# EAGLE board PCB (EAGLE 9.7.0)
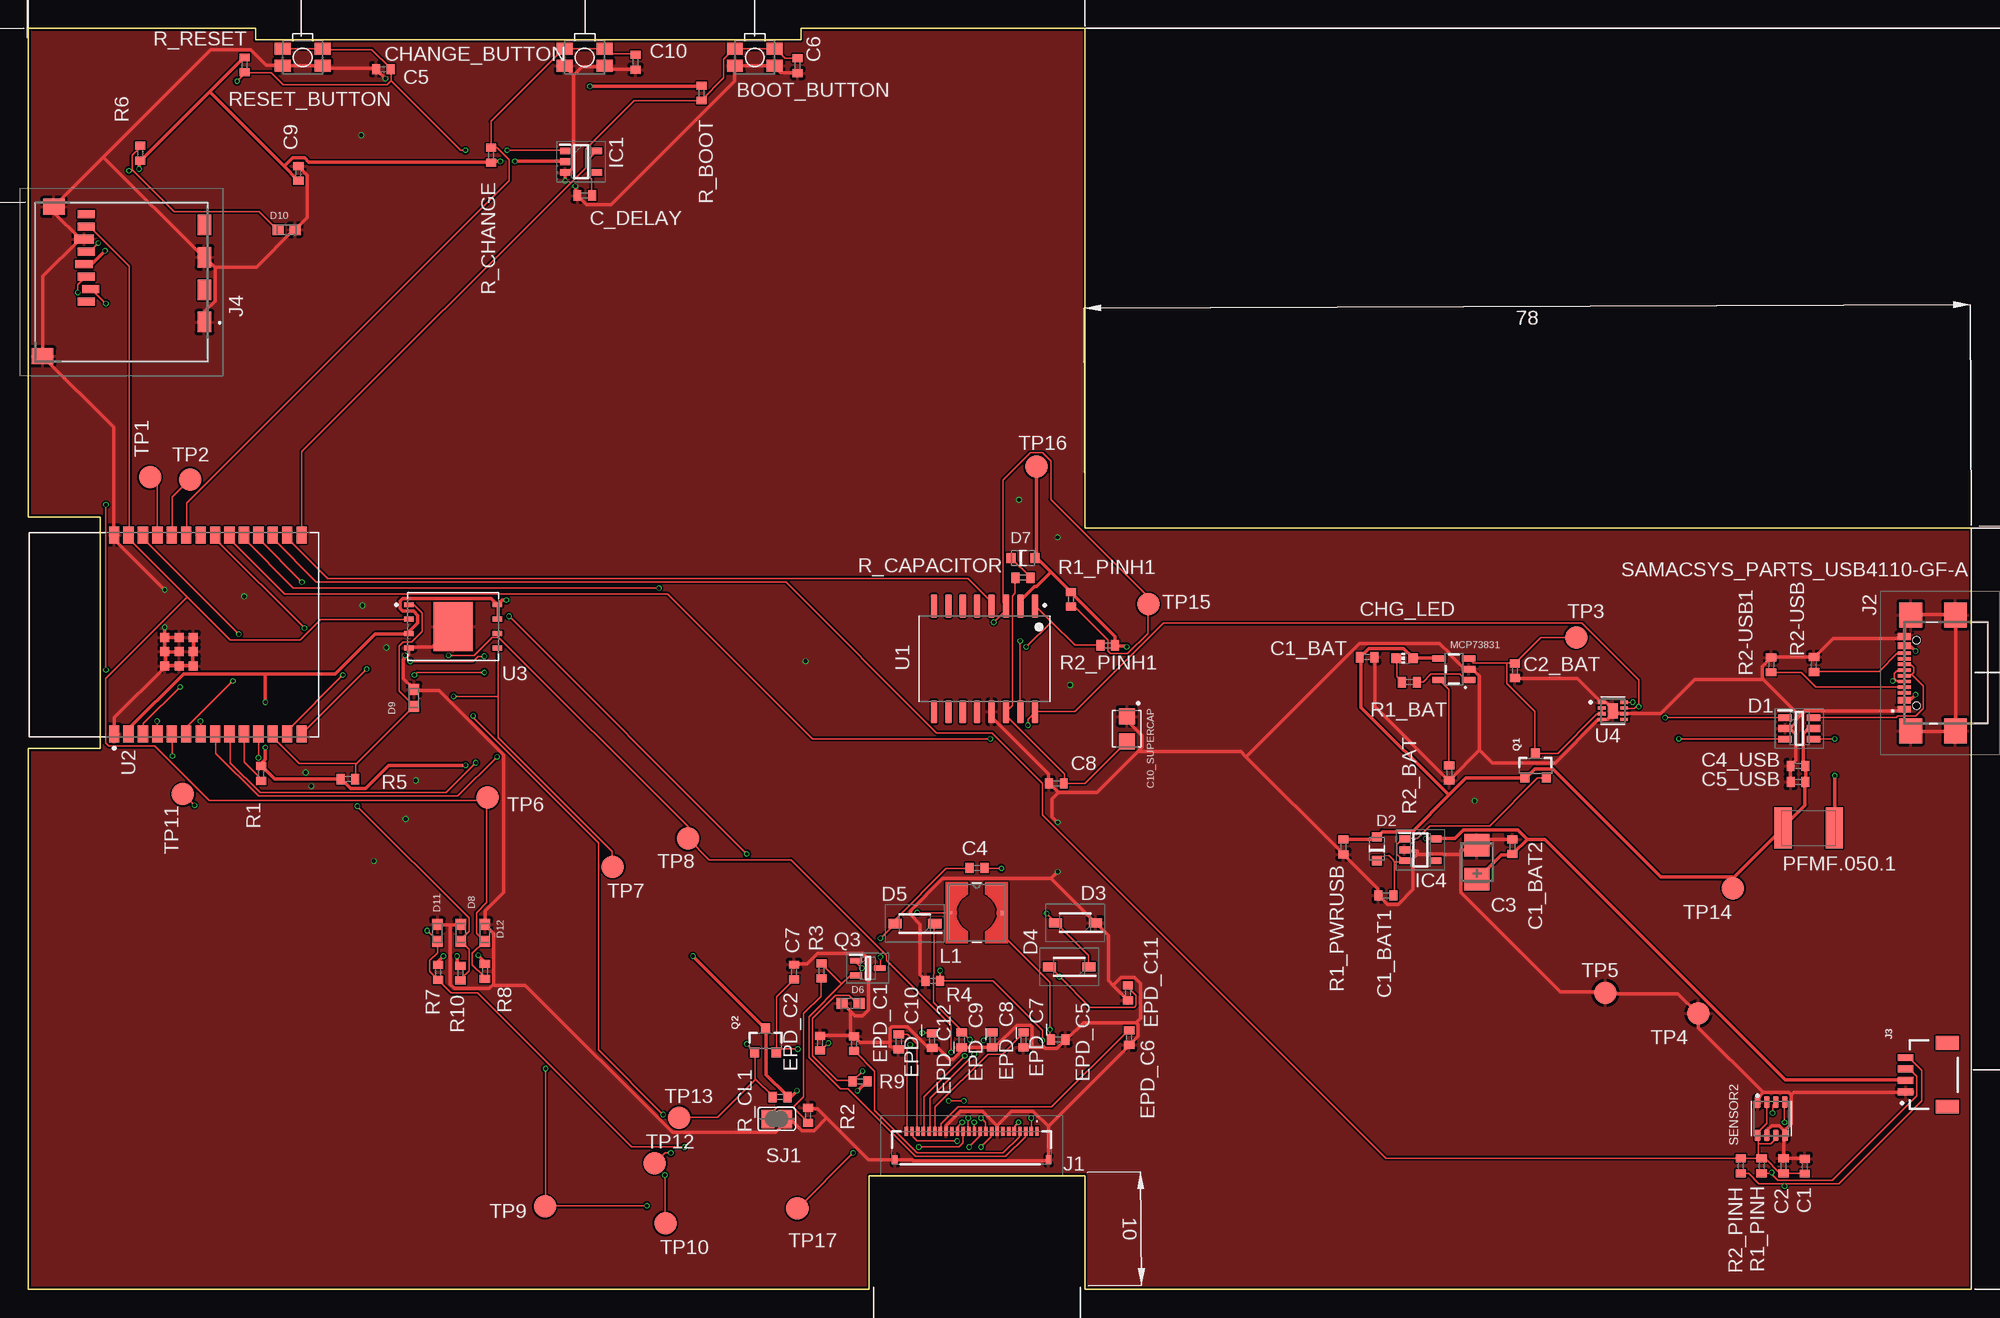
[diagram p0: board, top side]
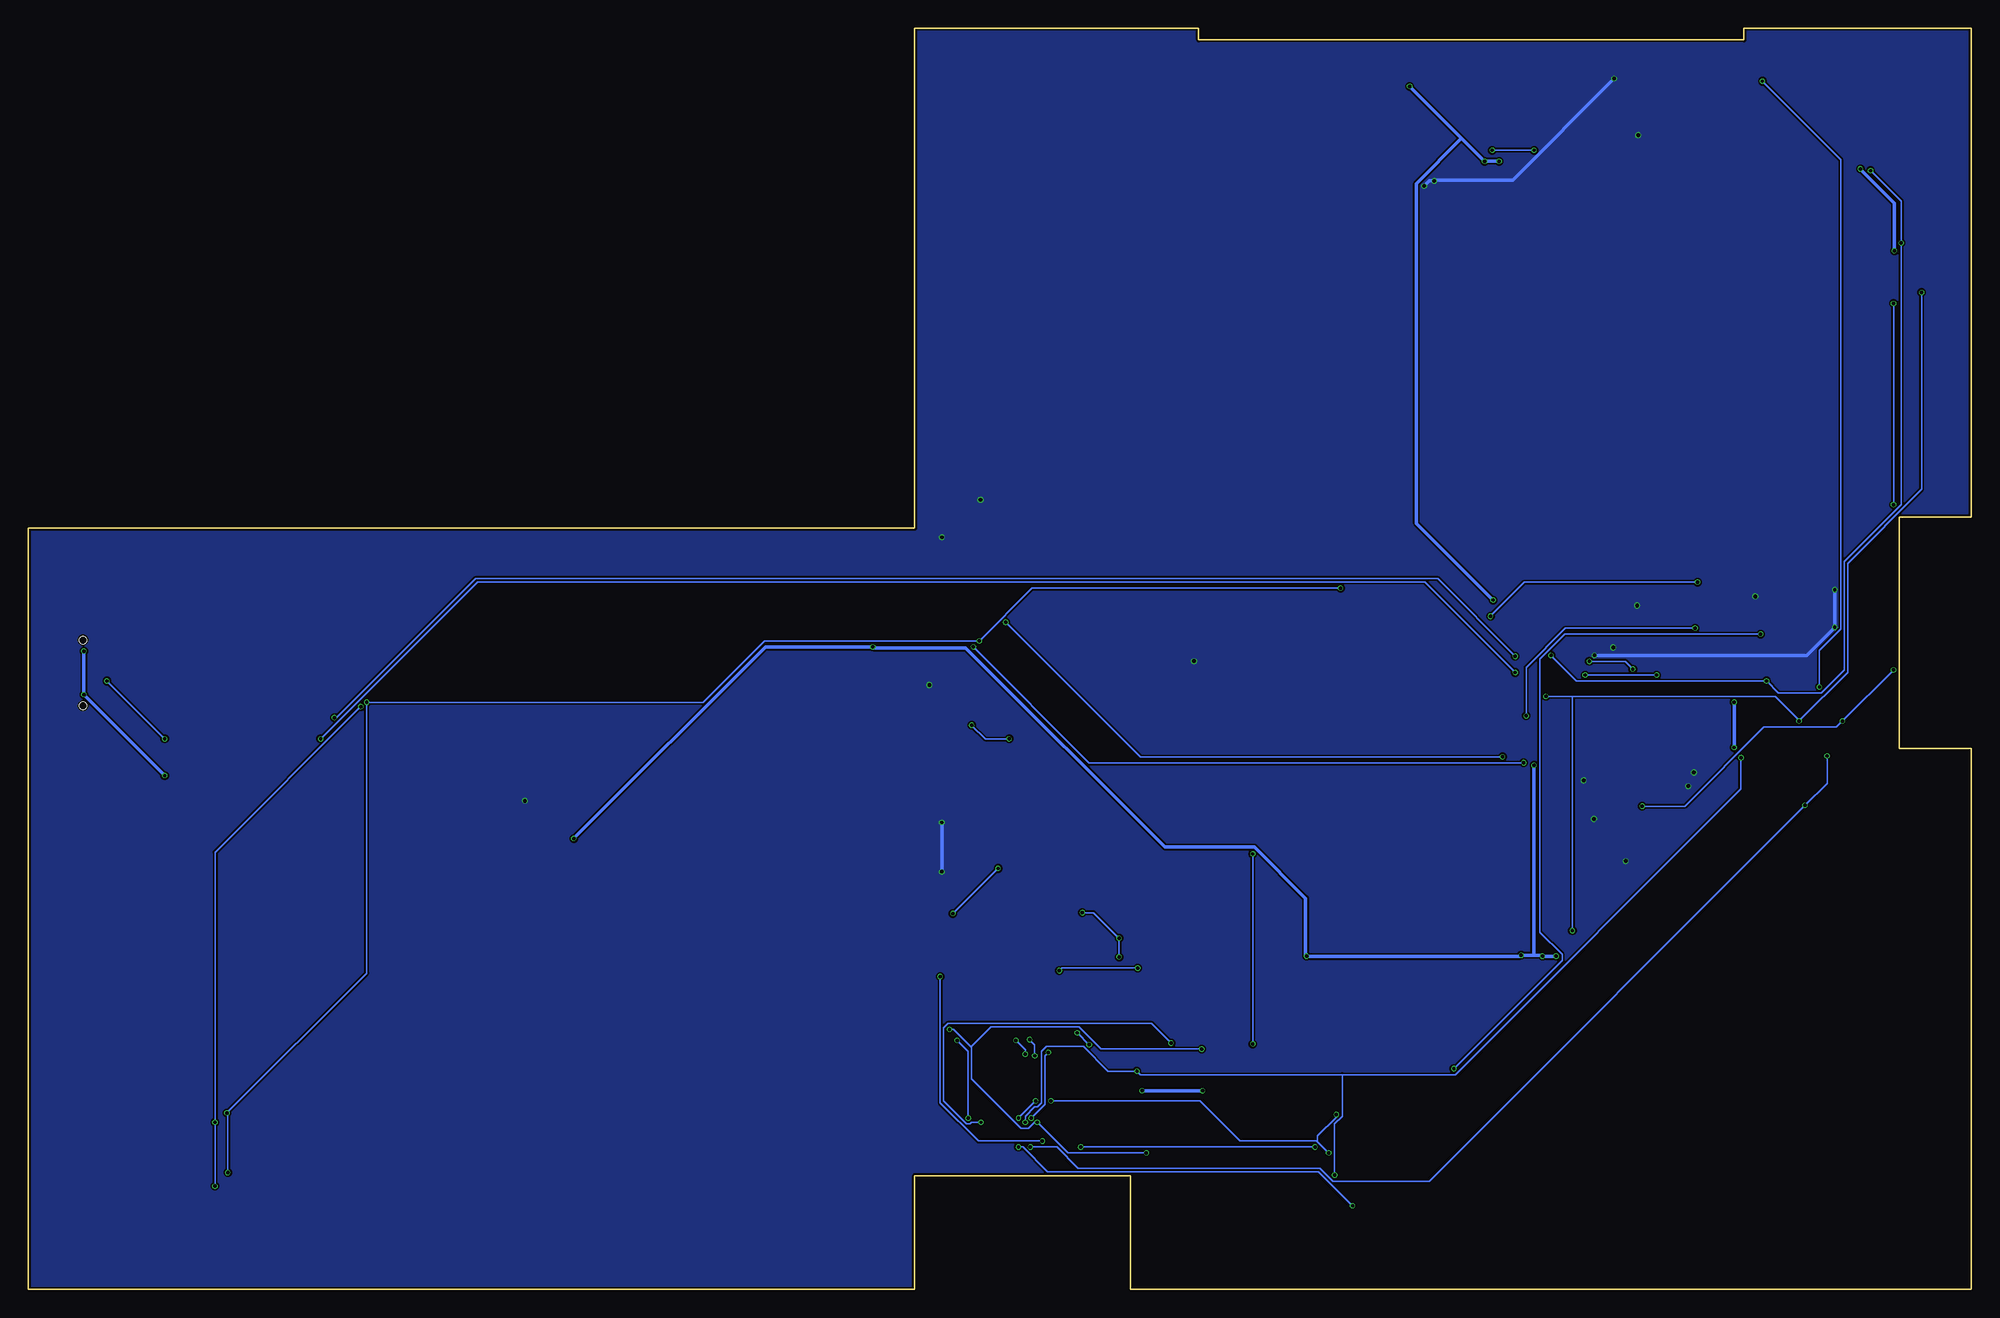
[diagram p1: board, bottom side, seen from below]

Size 171 x 111 mm. Coordinates in mm from the lower left corner, seen from the top.
Outline: 0,111 20,111 20,110 68,110 68,111 93,111 93,67 171,67 171,0 93,0 93,10 74,10 74,0 0,0 0,47.6 6.3,47.6 6.3,68 0,68 0,111
Copper layers (1*16): Top 0.035mm / dielectric 1.6mm / Bottom 0.035mm
Design rules "jlcpcb-2layers": minimum track width 0.15mm, minimum drill 0.3mm, track to track 0.15mm, track to pad 0.15mm, pad to pad 0.15mm, via to via 0.15mm, smd to smd 0.15mm, copper to edge 0.15mm, drill to drill 6mil, minimum pad ring 10mil, minimum via ring 3mil, stop-mask expansion 4mil, vias tented up to drill 0mil, thermal gap 10mil
Net classes: 1 power: width 0.3 mm

## Footprints (pad centres in the part's own frame; a part is rotated, then mirrored left to right if it is on the bottom)
MYBUTTON = smd 1.4 x 1.05: 1 1.75,0.75; 2 -1.75,0.75; 3 -1.75,-0.75; 4 1.75,-0.75
ESP32_WROVER_EAGLE-LTSPICE_C0402 = smd 0.7 x 0.9: 1 -0.65,0; 2 0.65,0
RCL_CT3528 = smd 2 x 2.2: + -1.5,0; - 1.5,0
CAPCP3225X100N = smd 1.4 x 1.4: 1 -1.1,0; 2 1.1,0
ADAFRUIT_CHIP-LED0603 = smd 0.8 x 0.8: A 0,-0.75; C 0,0.75
SOT95P280X145-6N = smd 1.2 x 0.6: 1 -1.25,0.95; 2 -1.25,0; 3 -1.25,-0.95; 4 1.25,-0.95; 5 1.25,0; 6 1.25,0.95
ESP32_WROVER_AVX---SD0805S020S1R0_AVX_SD0805S020S1R0_0 = smd 0.8 x 0.9: 1 -1.05,0; 2 1.05,0
SOD3716X135N = smd 1.15 x 0.8: 1 -1.75,0; 2 1.75,0
DIOC1608X36N = smd 0.97 x 0.94: 1 -0.75,0; 2 0.75,0
SOT95P280X125-5N = smd 0.9 x 0.6: 1 -1.4,0.95; 2 -1.4,0; 3 -1.4,-0.95; 4 1.4,-0.95; 5 1.4,0.95
SOT95P280X120-5N = smd 0.9 x 0.6: 1 -1.4,0.95; 2 -1.4,0; 3 -1.4,-0.95; 4 1.4,-0.95; 5 1.4,0.95
FH34SRJ24S05SH99 = smd 0.3 x 0.8: 1 5.75,1.45; 2 5.25,1.45; 3 4.75,1.45; 4 4.25,1.45; 5 3.75,1.45; 6 3.25,1.45; 7 2.75,1.45; 8 2.25,1.45; 9 1.75,1.45; 10 1.25,1.45; 11 0.75,1.45; 12 0.25,1.45; 13 -0.25,1.45; 14 -0.75,1.45; 15 -1.25,1.45; 16 -1.75,1.45; 17 -2.25,1.45; 18 -2.75,1.45; 19 -3.25,1.45; 20 -3.75,1.45; 21 -4.25,1.45; 22 -4.75,1.45; 23 -5.25,1.45; 24 -5.75,1.45 | smd 0.4 x 0.8: MP1 6.75,-1.05; MP2 -6.75,-1.05
SAMACSYS_PARTS_USB4110GFA = smd 0.3 x 1.15: A1 -3.35,3.678; A4 -2.55,3.678; A5 -1.25,3.678; A6 -0.25,3.678; A7 0.25,3.678; A8 1.25,3.678; A9 2.55,3.678; A12 3.35,3.678; B1 3.05,3.678; B4 2.25,3.678; B5 1.75,3.678; B6 0.75,3.678; B7 -0.75,3.678; B8 -1.75,3.678; B9 -2.25,3.678; B12 -3.05,3.678 | smd 2.18 x 2: MP1 -5.11,-0.827; MP2 5.11,-0.827; MP3 -5.11,3.103; MP4 5.11,3.103 | hole 0.65: -2.89,2.603; 2.89,2.603
JST04_1MM_RA = smd 0.6 x 1.35: 1 -1.5,0; 2 -0.5,0; 3 0.5,0; 4 1.5,0 | smd 1.2 x 2: NC1 2.8,-3.675; NC2 -2.8,-3.675
112ATAARR03ATTEND = smd 1.8 x 1.2: G1 10.6,10.4; G2 4.9,10.4; S1 7.75,10.4; S2 2.05,10.4 | smd 1.4 x 1.9: G3 13.6,-3.85; G4 0.45,-2.85 | smd 0.7 x 1.5: P1 8.8,0; P2 7.7,0.4; P3 6.6,0; P4 5.5,-0.2; P5 4.4,0; P7 2.2,0; P8 1.1,0 | smd 0.813 x 1.676: P6 3.3,-0.2
IND_4828-WE-TPC_WRE = smd 0.2 x 0.2: 1 -2.286,0 | smd 0.35 x 0.35: 2 2.286,0
ESP32_WROVER_SPARKFUN-IC-POWER_SOT23-5 = smd 0.55 x 1.2: 1 -0.95,-1.3; 2 0,-1.3; 3 0.95,-1.3; 4 0.95,1.3; 5 -0.95,1.3
ESP32C6_VARISTOR_CT/CN1812 = smd 1.5 x 3.6: 1 -2.25,0; 2 2.25,0
ESP32_WROVER_SPARKFUN-DISCRETESEMI_SOT23-3 = smd 0.8 x 0.9: 1 -0.95,-1; 2 0.95,-1; 3 0,1.1
SOT65P210X110-3N = smd 1.05 x 0.5: 1 -1.05,0.65; 2 -1.05,-0.65; 3 1.05,0
ESP32_WROVER_EAGLE-LTSPICE_R0402 = smd 0.7 x 0.9: 1 -0.65,0; 2 0.65,0
ESP32_WROVER_BME680_PSON80P300X300X100-8N = smd 1.016 x 0.5: 1 1.458,1.2; 2 1.458,0.4; 3 1.458,-0.4; 4 1.458,-1.2; 5 -1.458,-1.22; 6 -1.458,-0.4; 7 -1.458,0.4; 8 -1.458,1.2
SJ = smd 1.168 x 1.6: 1 -0.762,0; 2 0.762,0
TP20R = smd 2 x 2: TP 0,0
SOIC127P1032X265-16N = smd 2.05 x 0.59: 1 -4.655,4.445; 2 -4.655,3.175; 3 -4.655,1.905; 4 -4.655,0.635; 5 -4.655,-0.635; 6 -4.655,-1.905; 7 -4.655,-3.175; 8 -4.655,-4.445; 9 4.655,-4.445; 10 4.655,-3.175; 11 4.655,-1.905; 12 4.655,-0.635; 13 4.655,0.635; 14 4.655,1.905; 15 4.655,3.175; 16 4.655,4.445
XCVR_ESP32-C6-WROOM-1-N8 = smd 1.5 x 0.9: 1 -8.75,5.26; 2 -8.75,3.99; 3 -8.75,2.72; 4 -8.75,1.45; 5 -8.75,0.18; 6 -8.75,-1.09; 7 -8.75,-2.36; 8 -8.75,-3.63; 9 -8.75,-4.9; 10 -8.75,-6.17; 11 -8.75,-7.44; 12 -8.75,-8.71; 13 -8.75,-9.98; 14 -8.75,-11.25; 15 8.75,-11.25; 16 8.75,-9.98; 17 8.75,-8.71; 18 8.75,-7.44; 19 8.75,-6.17; 20 8.75,-4.9; 21 8.75,-3.63; 22 8.75,-2.36; 23 8.75,-1.09; 24 8.75,0.18; 25 8.75,1.45; 26 8.75,2.72; 27 8.75,3.99; 28 8.75,5.26 | smd 0.8 x 0.8: 29_1 -2.755,0.79; 29_2 -1.505,0.79; 29_3 -0.255,0.79; 29_4 -2.755,-0.46; 29_5 -1.505,-0.46; 29_6 -0.255,-0.46; 29_7 -2.755,-1.71; 29_8 -1.505,-1.71; 29_9 -0.255,-1.71
SON127P600X800X80-9N = smd 0.94 x 0.44: 1 -3.895,1.905; 2 -3.895,0.635; 3 -3.895,-0.635; 4 -3.895,-1.905; 5 3.895,-1.905; 6 3.895,-0.635; 7 3.895,0.635; 8 3.895,1.905 | smd 3.4 x 4.3: 9 0,0
SON50P200X200X80-9N = smd 0.76 x 0.27: 1 -0.985,0.75; 2 -0.985,0.25; 3 -0.985,-0.25; 4 -0.985,-0.75; 5 0.985,-0.75; 6 0.985,-0.25; 7 0.985,0.25; 8 0.985,0.75 | smd 0.9 x 1.3: 9 0,0

## Placement (x,y rotation side)
BOOT_BUTTON  BUTTON_CUSYOMV1BUTON  [MYBUTTON]  63.93,108.45 180 top
C1  100nF  [ESP32_WROVER_EAGLE-LTSPICE_C0402]  156.37,10.84 90 top
C1_BAT  4.7uF  [ESP32_WROVER_EAGLE-LTSPICE_C0402]  117.83,55.65 0 top
C1_BAT1  4.7uF  [ESP32_WROVER_EAGLE-LTSPICE_C0402]  119.48,34.67 180 top
C1_BAT2  4.7uF  [ESP32_WROVER_EAGLE-LTSPICE_C0402]  130.62,38.97 90 top
C2  100nF  [ESP32_WROVER_EAGLE-LTSPICE_C0402]  154.48,10.86 90 top
C2_BAT  4.7uF  [ESP32_WROVER_EAGLE-LTSPICE_C0402]  130.84,54.45 270 top
C3  100uF TANT  [RCL_CT3528]  127.51,37.6 90 top
C4  4.7uF/25V  [ESP32_WROVER_EAGLE-LTSPICE_C0402]  83.5,37.09 180 top
C4_USB  100nF  [ESP32_WROVER_EAGLE-LTSPICE_C0402]  155.76,46.07 180 top
C5  1uF  [ESP32_WROVER_EAGLE-LTSPICE_C0402]  31.25,107.41 180 top
C5_USB  4.7uF  [ESP32_WROVER_EAGLE-LTSPICE_C0402]  155.77,44.67 180 top
C6  100nF  [ESP32_WROVER_EAGLE-LTSPICE_C0402]  67.71,107.71 270 top
C7  10uF  [ESP32_WROVER_EAGLE-LTSPICE_C0402]  67.39,27.93 270 top
C8  100nF  [ESP32_WROVER_EAGLE-LTSPICE_C0402]  90.48,44.53 0 top
C9  100nF  [ESP32_WROVER_EAGLE-LTSPICE_C0402]  23.76,98.23 90 top
C10  100nF  [ESP32_WROVER_EAGLE-LTSPICE_C0402]  53.44,108.03 270 top
C10_SUPERCAP  CPH3225A  [CAPCP3225X100N]  96.69,49.34 270 top
C_DELAY  100nF  [ESP32_WROVER_EAGLE-LTSPICE_C0402]  48.97,96.29 180 top
CHANGE_BUTTON  BUTTON_CUSYOMV1BUTON  [MYBUTTON]  48.96,108.45 180 top
CHG_LED  [ADAFRUIT_CHIP-LED0603]  121.14,55.55 90 top
D1  USBLC6-2SC6Y  [SOT95P280X145-6N]  155.88,49.37 0 top
D2  ESP32_WROVER_AVX---SD0805S020S1R0_AVX_SD0805S020S1R0_0_0B1G_DIODE  [ESP32_WROVER_AVX---SD0805S020S1R0_AVX_SD0805S020S1R0_0]  118.69,38.78 90 top
D3  MBR0530MBR_SOD_DIODE  [SOD3716X135N]  92.16,32.27 180 top
D4  MBR0530MBR_SOD_DIODE  [SOD3716X135N]  91.62,28.38 180 top
D5  MBR0530MBR_SOD_DIODE  [SOD3716X135N]  78.03,32.19 180 top
D6  PGB1010603MRPGB_D1ODE  [DIOC1608X36N]  72.38,25.17 180 top
D7  ESP32_WROVER_AVX---SD0805S020S1R0_AVX_SD0805S020S1R0_0_0B1G_DIODE  [ESP32_WROVER_AVX---SD0805S020S1R0_AVX_SD0805S020S1R0_0]  87.54,64.38 0 top
D8  PGB1010603MRPGB_D1ODE  [DIOC1608X36N]  38.06,31.37 90 top
D9  PGB1010603MRPGB_D1ODE  [DIOC1608X36N]  33.94,52.07 90 top
D10  PGB1010603MRPGB_D1ODE  [DIOC1608X36N]  22.72,93.27 0 top
D11  PGB1010603MRPGB_D1ODE  [DIOC1608X36N]  36,31.37 90 top
D12  PGB1010603MRPGB_D1ODE  [DIOC1608X36N]  40.18,31.37 90 top
EPD_C1  1uF/50V  [ESP32_WROVER_EAGLE-LTSPICE_C0402]  72.68,21.62 270 top
EPD_C2  1uF/50V  [ESP32_WROVER_EAGLE-LTSPICE_C0402]  69.68,21.67 270 top
EPD_C5  0.1uF/50V  [ESP32_WROVER_EAGLE-LTSPICE_C0402]  90.64,21.99 180 top
EPD_C6  1uF/50V  [ESP32_WROVER_EAGLE-LTSPICE_C0402]  96.89,22.15 90 top
EPD_C7  1uF/50V  [ESP32_WROVER_EAGLE-LTSPICE_C0402]  87.6,21.95 90 top
EPD_C8  1uF/50V  [ESP32_WROVER_EAGLE-LTSPICE_C0402]  84.85,21.95 90 top
EPD_C9  1uF/50V  [ESP32_WROVER_EAGLE-LTSPICE_C0402]  82.16,21.95 90 top
EPD_C10  1uF/50V  [ESP32_WROVER_EAGLE-LTSPICE_C0402]  76.61,21.79 90 top
EPD_C11  1uF/50V  [ESP32_WROVER_EAGLE-LTSPICE_C0402]  96.79,26.09 90 top
EPD_C12  1uF/50V  [ESP32_WROVER_EAGLE-LTSPICE_C0402]  79.55,21.89 90 top
IC1  BD5229G-TR  [SOT95P280X125-5N]  48.65,99.27 0 top
IC4  XC6220A331MR-G  [SOT95P280X120-5N]  122.53,38.69 0 top
J1  FH34SRJ-24S-0.5SH_99_  [FH34SRJ24S05SH99]  83.03,12.44 0 top
J2  SAMACSYS_PARTS_USB4110-GF-A  [SAMACSYS_PARTS_USB4110GFA]  168.8,54.26 90 top
J3  QWIIC_RIGHT_ANGLE  [JST04_1MM_RA]  165.23,18.89 90 top
J4  112A-TAAR-R03_ATTEND  [112ATAARR03ATTEND]  5.09,95.75 270 top
L1  68uH  [IND_4828-WE-TPC_WRE]  83.47,33.15 0 top
MCP73831  ESP32_WROVER_SPARKFUN-IC-POWER_MCP73831  [ESP32_WROVER_SPARKFUN-IC-POWER_SOT23-5]  125.48,54.59 90 top
PFMF.050.1  ESP32C6_VARISTORPFMF_ESP32C6_VARISTORS  [ESP32C6_VARISTOR_CT/CN1812]  156.7,40.6 180 top
Q1  20V/4.2A/52mΩ/1.4W  [ESP32_WROVER_SPARKFUN-DISCRETESEMI_SOT23-3]  132.66,46.06 0 top
Q2  20V/4.2A/52mΩ/1.4W  [ESP32_WROVER_SPARKFUN-DISCRETESEMI_SOT23-3]  64.88,21.86 0 top
Q3  SI1308EDL-T1-GE3  [SOT65P210X110-3N]  73.89,28.28 0 top
R1  10k  [ESP32_WROVER_EAGLE-LTSPICE_R0402]  20.49,45.41 90 top
R1_BAT  200  [ESP32_WROVER_EAGLE-LTSPICE_R0402]  121.55,53.45 0 top
R1_PINH  10k  [ESP32_WROVER_EAGLE-LTSPICE_R0402]  152.56,10.87 90 top
R1_PINH1  10k  [ESP32_WROVER_EAGLE-LTSPICE_R0402]  91.76,60.74 90 top
R1_PWRUSB  100k  [ESP32_WROVER_EAGLE-LTSPICE_R0402]  115.75,38.94 90 top
R2  2.2  [ESP32_WROVER_EAGLE-LTSPICE_R0402]  68.63,15.31 270 top
R2-USB  5k1  [ESP32_WROVER_EAGLE-LTSPICE_R0402]  157.17,54.99 90 top
R2-USB1  5k1  [ESP32_WROVER_EAGLE-LTSPICE_R0402]  153.4,54.97 270 top
R2_BAT  2k  [ESP32_WROVER_EAGLE-LTSPICE_R0402]  125.06,45.45 90 top
R2_PINH  10k  [ESP32_WROVER_EAGLE-LTSPICE_R0402]  150.74,10.87 90 top
R2_PINH1  10k  [ESP32_WROVER_EAGLE-LTSPICE_R0402]  95.01,56.69 0 top
R3  0.47  [ESP32_WROVER_EAGLE-LTSPICE_R0402]  69.81,28.03 90 top
R4  10k  [ESP32_WROVER_EAGLE-LTSPICE_R0402]  79.61,27.16 0 top
R5  10k  [ESP32_WROVER_EAGLE-LTSPICE_R0402]  28.13,44.91 180 top
R6  10k  [ESP32_WROVER_EAGLE-LTSPICE_R0402]  9.85,100.01 270 top
R7  10k  [ESP32_WROVER_EAGLE-LTSPICE_R0402]  36.07,27.89 90 top
R8  10k  [ESP32_WROVER_EAGLE-LTSPICE_R0402]  40.19,27.99 90 top
R9  10k  [ESP32_WROVER_EAGLE-LTSPICE_R0402]  73.21,18.31 0 top
R10  10k  [ESP32_WROVER_EAGLE-LTSPICE_R0402]  38.03,27.83 90 top
R_BOOT  10k  [ESP32_WROVER_EAGLE-LTSPICE_R0402]  59.25,105.31 90 top
R_CAPACITOR  15  [ESP32_WROVER_EAGLE-LTSPICE_R0402]  87.55,62.64 0 top
R_CHANGE  10k  [ESP32_WROVER_EAGLE-LTSPICE_R0402]  40.72,99.84 270 top
R_CL1  10k  [ESP32_WROVER_EAGLE-LTSPICE_R0402]  66.16,16.93 0 top
R_RESET  10k  [ESP32_WROVER_EAGLE-LTSPICE_R0402]  19.03,107.79 90 top
RESET_BUTTON  BUTTON_CUSYOMV1BUTON  [MYBUTTON]  24.14,108.45 180 top
SENSOR2  BME688  [ESP32_WROVER_BME680_PSON80P300X300X100-8N]  153.41,15.02 90 top
SJ1  [SJ]  65.86,14.99 180 top
TP1  TPTP20R  [TP20R]  10.71,71.49 0 top
TP2  TPTP20R  [TP20R]  14.23,71.29 0 top
TP3  TPTP20R  [TP20R]  136.25,57.39 0 top
TP4  TPTP20R  [TP20R]  146.97,24.29 0 top
TP5  TPTP20R  [TP20R]  138.79,26.09 0 top
TP6  TPTP20R  [TP20R]  40.41,43.29 0 top
TP7  TPTP20R  [TP20R]  51.43,37.19 0 top
TP8  TPTP20R  [TP20R]  58.05,39.69 0 top
TP9  TPTP20R  [TP20R]  45.47,7.29 0 top
TP10  TPTP20R  [TP20R]  56.08,5.81 0 top
TP11  TPTP20R  [TP20R]  13.59,43.59 90 top
TP12  TPTP20R  [TP20R]  55.13,11.11 0 top
TP13  TPTP20R  [TP20R]  57.28,15.11 0 top
TP14  TPTP20R  [TP20R]  150.03,35.31 0 top
TP15  TPTP20R  [TP20R]  98.58,60.31 0 top
TP16  TPTP20R  [TP20R]  88.73,72.41 0 top
TP17  TPTP20R  [TP20R]  67.68,7.11 0 top
U1  DS3231SN#  [SOIC127P1032X265-16N]  84.15,55.5 270 top
U2  ESP32-C6-WROOM-1-N8  [XCVR_ESP32-C6-WROOM-1-N8]  12.8,57.64 90 top
U3  W25Q512JVEIQ  [SON127P600X800X80-9N]  37.39,58.36 0 top
U4  MAX17048G+T10  [SON50P200X200X80-9N]  139.47,50.92 0 top

## Library data of the parts
BOOT_BUTTON C1 C1_BAT C1_BAT1 C1_BAT2 C2 C2_BAT C4 C4_USB C5 C5_USB C6-C10 C_DELAY CHANGE_BUTTON CHG_LED D2-D12 EPD_C1 EPD_C2 EPD_C5-EPD_C12 PFMF.050.1 Q1 Q2 R1 R1_BAT R1_PINH R1_PINH1 R1_PWRUSB R2 R2-USB R2-USB1 R2_BAT R2_PINH R2_PINH1 R3-R10 R_BOOT R_CAPACITOR R_CHANGE R_CL1 R_RESET RESET_BUTTON SJ1 TP1-TP17 = LibTSC
C3 = LibTSC; SPICEPREFIX: C
C10_SUPERCAP = LibTSC; AVAILABILITY: Not in stock; CHECK_PRICES: https://www.snapeda.com/parts/CPH3225A/Seiko+Instruments/view-part/?ref=eda; DESCRIPTION: 11 mF (EDLC) Supercapacitor 3.3 V 1210 (3225 Metric) - -; MF: Seiko Instruments; MP: CPH3225A; PACKAGE: 1210 Seiko; PRICE: None; PURCHASE-URL: https://www.snapeda.com/api/url_track_click_mouser/?unipart_id=562593&manufacturer=Seiko Instruments&part_name=CPH3225A&search_term=None; SNAPEDA_LINK: https://www.snapeda.com/parts/CPH3225A/Seiko+Instruments/view-part/?ref=snap
D1 = LibTSC; AVAILABILITY: In Stock; CHECK_PRICES: https://www.snapeda.com/parts/USBLC6-2SC6Y/STMicroelectronics/view-part/?ref=eda; DESCRIPTION: 17V Clamp 5A (8/20µs) Ipp Tvs Diode Surface Mount SOT-23-6; MF: STMicroelectronics; MP: USBLC6-2SC6Y; PACKAGE: SOT-23-6 STMicroelectronics; PRICE: None; SNAPEDA_LINK: https://www.snapeda.com/parts/USBLC6-2SC6Y/STMicroelectronics/view-part/?ref=snap
IC1 = LibTSC; DESCRIPTION: Voltage Detector with Adjustable Delay Time: CMOS processes are utilized to develop high precision, low current consumption CMOS reset ICs that allow arbitrary setting of the delay time. The extensive lineup includes both Nch Open Drain and CMOS output types in a wide range of detection voltages (from 2.3V to 6.0V, in 0.1V steps), enabling selection of the ideal solution based on customer requirements. In addition, the entire series is of course both lead-free and RoHS-compliant.; HEIGHT: 1.25mm; MANUFACTURER_NAME: ROHM Semiconductor; MANUFACTURER_PART_NUMBER: BD5229G-TR; MOUSER_PART_NUMBER: 755-BD5229G-TR; MOUSER_PRICE-STOCK: https://www.mouser.co.uk/ProductDetail/ROHM-Semiconductor/BD5229G-TR?qs=4kLU8WoGk0vvnhrrYwdszw%3D%3D
IC4 = LibTSC; DESCRIPTION: LDO Voltage Regulators; HEIGHT: 1.2mm; MANUFACTURER_NAME: Torex; MANUFACTURER_PART_NUMBER: XC6220A331MR-G; MOUSER_PART_NUMBER: 865-XC6220A331MR-G; MOUSER_PRICE-STOCK: https://www.mouser.co.uk/ProductDetail/Torex-Semiconductor/XC6220A331MR-G?qs=AsjdqWjXhJ8ZSWznL1J0gg%3D%3D
J1 = LibTSC; DESCRIPTION: 24 Position FFC, FPC Connector Contacts, Top and Bottom 0.020" (0.50mm) Surface Mount, Right Angle; HEIGHT: 1.1mm; MANUFACTURER_NAME: Hirose; MANUFACTURER_PART_NUMBER: FH34SRJ-24S-0.5SH(99); MOUSER_PART_NUMBER: 798-FH34SRJ24S05SH99; MOUSER_PRICE-STOCK: https://www.mouser.co.uk/ProductDetail/Hirose-Connector/FH34SRJ-24S-0.5SH99?qs=vcbW%252B4%252BSTIpKBl5ap9J8Fw%3D%3D
J2 = LibTSC; DESCRIPTION: CONN USB 2.0 TYPE-C R/A SMT; HEIGHT: 3.26mm; MANUFACTURER_NAME: GCT (GLOBAL CONNECTOR TECHNOLOGY); MANUFACTURER_PART_NUMBER: USB4110-GF-A; MOUSER_PART_NUMBER: 640-USB4110-GF-A; MOUSER_PRICE-STOCK: https://www.mouser.co.uk/ProductDetail/GCT/USB4110-GF-A?qs=KUoIvG%2F9IlYiZvIXQjyJeA%3D%3D
J3 = LibTSC; PROD_ID: CONN-13694
J4 = LibTSC; DESCRIPTION: Micro SD Card Socket, Push-Push Type, Top Mount, SMT, H=1.83mm, 10u; HEIGHT: 1.9mm; MANUFACTURER_NAME: ATTEND; MANUFACTURER_PART_NUMBER: 112A-TAAR-R03 ATTEND
L1 = LibTSC; COPYRIGHT: Copyright (C) 2024 Ultra Librarian. All rights reserved.; MANUFACTURER_PART_NUMBER: 744043680; MFR_NAME: Wurth Electronics
MCP73831 = LibTSC; PROD_ID: IC-09995
Q3 = LibTSC; AVAILABILITY: In Stock; CHECK_PRICES: https://www.snapeda.com/parts/SI1308EDL-T1-GE3/Vishay+Siliconix/view-part/?ref=eda; DESCRIPTION: Si1308EDL-T1-GE3 N-channel MOSFET Transistor, 1.5 A, 30 V, 3-Pin SC-70 | Siliconix / Vishay SI1308EDL-T1-GE3; MF: Vishay Siliconix; MP: SI1308EDL-T1-GE3; PACKAGE: SOT-323 Vishay Semiconductor; PRICE: None; PURCHASE-URL: https://www.snapeda.com/api/url_track_click_mouser/?unipart_id=274603&manufacturer=Vishay Siliconix&part_name=SI1308EDL-T1-GE3&search_term=None; SNAPEDA_LINK: https://www.snapeda.com/parts/SI1308EDL-T1-GE3/Vishay+Siliconix/view-part/?ref=snap
SENSOR2 = LibTSC; AVAILABILITY: Unavailable; DESCRIPTION: Integrated Environmental Unit; MF: Bosch Sensortec; MP: BME680; PACKAGE: LGA-8 Bosch Tools; PRICE: None
U1 = LibTSC; AVAILABILITY: In Stock; CHECK_PRICES: https://www.snapeda.com/parts/DS3231SN%23/Analog+Devices/view-part/?ref=eda; DESCRIPTION: Extremely Accurate I²C-Integrated RTC/TCXO/Crystal; MF: Analog Devices; MP: DS3231SN#; PACKAGE: SOIC-16 Maxim; PRICE: None; PURCHASE-URL: https://www.snapeda.com/api/url_track_click_mouser/?unipart_id=99048&manufacturer=Analog Devices&part_name=DS3231SN#&search_term=None; SNAPEDA_LINK: https://www.snapeda.com/parts/DS3231SN%23/Analog+Devices/view-part/?ref=snap
U2 = LibTSC; AVAILABILITY: In Stock; CHECK_PRICES: https://www.snapeda.com/parts/ESP32-C6-WROOM-1-N8/Espressif+Systems/view-part/?ref=eda; DESCRIPTION: Multiprotocol Modules ESP32-C6 module, Wi-Fi 6 in 2.4 GHz band, Bluetooth 5, Zigbee 3.0 and Thread. ESP34-WROOM Compatible - ENGINEERING SAMPLE; MF: Espressif Systems; MP: ESP32-C6-WROOM-1-N8; PACKAGE: None; PRICE: None; SNAPEDA_LINK: https://www.snapeda.com/parts/ESP32-C6-WROOM-1-N8/Espressif+Systems/view-part/?ref=snap
U3 = LibTSC; AVAILABILITY: In Stock; CHECK_PRICES: https://www.snapeda.com/parts/W25Q512JVEIQ/Winbond+Electronics/view-part/?ref=eda; DESCRIPTION: FLASH - NOR Memory IC 512Mb (64M x 8) SPI - Quad I/O 133 MHz 8-WSON (8x6); MF: Winbond Electronics; MP: W25Q512JVEIQ; PACKAGE: Package; PRICE: None; SNAPEDA_LINK: https://www.snapeda.com/parts/W25Q512JVEIQ/Winbond+Electronics/view-part/?ref=snap
U4 = LibTSC; AVAILABILITY: In Stock; CHECK_PRICES: https://www.snapeda.com/parts/MAX17048G+T10/Analog+Devices/view-part/?ref=eda; DESCRIPTION: 3µA 1-Cell/2-Cell Fuel Gauge with ModelGauge; MF: Analog Devices; MP: MAX17048G+T10; PACKAGE: TDFN-8 Maxim; PRICE: None; PURCHASE-URL: https://www.snapeda.com/api/url_track_click_mouser/?unipart_id=329239&manufacturer=Analog Devices&part_name=MAX17048G+T10&search_term=None; SNAPEDA_LINK: https://www.snapeda.com/parts/MAX17048G+T10/Analog+Devices/view-part/?ref=snap

## Nets
3V3 [power]: C1_BAT2.1 C3.+ C9.1 D7.2 IC1.2 IC4.5 J3.2 J4.P4 Q2.3 R1.2 R1_PINH1.2 R2_PINH1.2 R5.2 R6.2 R7.2 R8.2 R9.2 R10.2 R_BOOT.2 R_CHANGE.2 R_CL1.2 R_RESET.2 TP16.TP U1.2 U2.2 U3.3 U3.7 U3.8
32KHZ: R2_PINH1.1 U1.1 U2.9
DN: D1.4 J2.A7 J2.B7
DP: D1.6 J2.A6 J2.B6
EPD_3V3: C7.2 EPD_C5.2 J1.15 J1.16 L1.2 Q2.2 TP17.TP
EPD_3V3_C: Q2.1 R_CL1.1 TP13.TP U2.18
EPD_BUSY: J1.9 TP9.TP U2.26
EPD_CS: D6.1 J1.12 R9.1 TP10.TP U2.11
EPD_DC: J1.11 TP11.TP U2.5
EPD_RST: J1.10 TP12.TP U2.21
FLASH_CS: D9.1 R5.1 U2.12 U3.1
GDR: J1.2 Q3.1 R4.2
GND [power]: BOOT_BUTTON.1 BOOT_BUTTON.2 C1.2 C1_BAT1.2 C1_BAT2.2 C1_BAT.2 C2.2 C2_BAT.2 C3.- C4_USB.2 C5.2 C5_USB.2 C6.2 C7.1 C8.1 C9.2 C10.2 C10_SUPERCAP.1 C_DELAY.2 CHANGE_BUTTON.1 CHANGE_BUTTON.2 D1.2 D3.1 D6.2 D8.2 D9.2 D10.2 D11.2 D12.2 EPD_C1.1 EPD_C2.1 EPD_C5.1 EPD_C6.1 EPD_C7.1 EPD_C8.1 EPD_C9.1 EPD_C10.1 EPD_C11.1 EPD_C12.1 IC1.3 IC4.2 J1.8 J1.17 J1.MP1 J1.MP2 J2.A1 J2.A12 J2.B1 J2.B12 J2.MP1 J2.MP2 J2.MP3 J2.MP4 J3.1 J4.G1 J4.G2 J4.G3 J4.G4 J4.P6 MCP73831.2 R1_PWRUSB.1 R2-USB1.1 R2-USB.2 R2.1 R2_BAT.1 R4.1 RESET_BUTTON.1 RESET_BUTTON.2 SENSOR2.1 SENSOR2.5 SENSOR2.7 SJ1.1 TP4.TP TP5.TP U1.13 U2.1 U2.28 U2.29_1 U2.29_2 U2.29_3 U2.29_4 U2.29_5 U2.29_6 U2.29_7 U2.29_8 U2.29_9 U3.4 U3.9 U4.1 U4.4 U4.6 U4.9
GPIO8: R1.1 U2.10
I2C_PW: C1.1 C2.1 R1_PINH.2 R2_PINH.2 SENSOR2.2 SENSOR2.6 SENSOR2.8 U2.17
INT_RTC: R1_PINH1.1 TP15.TP U1.3 U2.8
IO/BOOT: BOOT_BUTTON.3 BOOT_BUTTON.4 C6.1 R_BOOT.1 U2.15
IO/CHANGE: C10.1 CHANGE_BUTTON.3 CHANGE_BUTTON.4 R_CHANGE.1 U2.23
MISO: D12.1 J4.P7 R8.1 TP6.TP U2.27 U3.2
MOSI: D11.1 J1.14 J4.P3 R7.1 TP7.TP U2.7 U3.5
N$1: J2.B5 R2-USB.1
N$2: J2.A5 R2-USB1.2
N$5: C1_BAT1.1 D2.1 IC4.1 IC4.3 Q1.2
N$8: MCP73831.1 R1_BAT.2
N$9: MCP73831.5 R2_BAT.2
N$10: CHG_LED.C R1_BAT.1
N$11: C4.1 D3.2 D4.1
N$12: EPD_C6.2 J1.18
N$13: EPD_C7.2 J1.19
N$14: EPD_C8.2 J1.20
N$15: C_DELAY.1 IC1.5
N$16: EPD_C10.2 J1.22
N$17: D7.1 R_CAPACITOR.2
N$18: EPD_C12.2 J1.24
N$21: EPD_C1.2 J1.4
N$22: EPD_C2.2 J1.5
PREVGH: D5.1 EPD_C9.2 J1.21
PREVGL: D4.2 EPD_C11.2 J1.23
RESE: J1.3 Q3.2 R3.2
RESE': R2.2 R3.1 SJ1.2
RESET: C5.1 IC1.1 R_RESET.1 RESET_BUTTON.3 RESET_BUTTON.4 U2.3
RTC_RST: U1.4 U2.16
RX: TP2.TP U2.24
SCK: D10.1 J1.13 J4.P5 R6.1 TP8.TP U2.6 U3.6
SCL: J3.4 R2_PINH.1 SENSOR2.4 U1.16 U2.20 U4.7
SDA: J3.3 R1_PINH.1 SENSOR2.3 U1.15 U2.19 U4.8
SRC: C4.2 D5.2 L1.1 Q3.3
SS_SD: D8.1 J4.P2 R10.1 U2.4
TX: TP1.TP U2.25
USB_D+: D1.1 U2.14
USB_D-: D1.3 U2.13
VBAT: C2_BAT.1 MCP73831.3 Q1.3 TP3.TP U4.2 U4.3
VBUS [power]: C1_BAT.1 C4_USB.1 C5_USB.1 CHG_LED.A D1.5 D2.2 MCP73831.4 PFMF.050.1.2 Q1.1 R1_PWRUSB.2 TP14.TP
VRTC: C8.2 C10_SUPERCAP.2 R_CAPACITOR.1 U1.14
VUSB [power]: J2.A4 J2.A9 J2.B4 J2.B9 PFMF.050.1.1

## Tracks (layer width: path | path; a pad name or v marks a point on that pad's centre or on a via)
3V3  (via drill 0.3)
  Top 0.3: 90,63.15 R1_PINH1.2 91.8,61.27 95.62,57.45 95.62,56.7 R2_PINH1.2 95.78,56.62 96.6,56.62 v96.67,56.55 | 90,63.15 88.8,64.35 88.65,64.35 D7.2 88.72,64.42 88.72,72.38 TP16.TP | 90,63.15 88.72,61.88 88.58,61.88 87.38,60.67 87.38,60.23 U1.2 | C3.+ 127.58,36.15 129.68,38.25 130.57,38.25 C1_BAT2.1 130.72,38.4 131.9,39.58 131.9,39.6 | 131.9,39.6 131.9,39.62 131.1,40.42 126.3,40.42 125.55,39.67 123.97,39.67 IC4.5 123.83,39.67 v123,39.67 | 131.9,39.6 133.5,39.6 154.65,18.45 165.22,18.45 J3.2 | 15.94,105.41 18.98,108.45 R_RESET.2 | 15.94,105.41 9.9,99.38 R6.2 9.75,99.3 v9.75,98.62 | 15.94,105.41 22.5,98.85 | 22.5,98.85 23.7,97.65 C9.1 | 22.5,98.85 23.25,99.6 24.3,99.6 24.68,99.22 40.65,99.22 R_CHANGE.2 40.8,99.3 v41.55,99.3 | v42.83,99.3 47.25,99.3 IC1.2 | v49.42,105.9 59.25,105.9 R_BOOT.2 | v6.75,91.42 5.62,90.3 4.95,90.3 J4.P4 | U3.8 40.73,60.83 32.92,60.83 32.7,60.6 32.7,59.92 32.92,59.7 33.9,59.7 34.27,59.33 34.27,58.65 33.52,57.9 33.52,57.75 U3.3 33.38,57.67 30.52,57.67 27,54.15 20.85,54.15 | U3.7 41.33,59.02 41.33,60.15 U3.8 | 20.85,54.15 13.65,54.15 8.85,49.35 8.85,48.9 U2.2 | v20.85,47.7 20.85,46.65 20.55,46.35 20.55,46.2 R1.2 20.55,46.05 21.68,44.92 27.45,44.92 R5.2 27.6,44.85 28.35,44.1 29.7,44.1 31.73,46.12 v38.48,46.12 | 20.85,54.15 v20.85,51.67 | v36.52,29.33 36.08,28.88 36.08,28.58 R7.2 | v37.73,29.33 37.73,28.8 38.02,28.5 R10.2 | v39.6,29.4 40.12,28.88 40.12,28.65 R8.2 | v72.97,17.47 73.8,18.3 R9.2 | v67.65,17.47 67.12,16.95 66.95,16.95 R_CL1.2 66.7,17.15 64.95,18.9 64.95,22.95 Q2.3 64.8,23.03 v58.5,29.33 | v42.08,60.67 41.7,60.67 41.4,60.38 U3.8
  Bottom 0.3: v123,39.67 106.12,56.55 v96.67,56.55 96.6,56.48 88.5,56.48 70.95,38.92 63.08,38.92 58.58,34.42 58.58,29.4 v58.5,29.33 39.67,29.33 v39.6,29.4 38.48,29.4 | v41.55,99.3 v42.83,99.3 44.85,101.33 | 44.85,101.33 v49.42,105.9 | v6.75,91.42 6.75,95.62 v9.75,98.62 | v20.85,51.67 v20.85,47.7 | v36.52,29.33 v37.73,29.33 37.8,29.4 38.48,29.4 | v67.65,17.47 v72.97,17.47 | 38.48,29.4 v38.48,46.12 | 44.85,101.33 48.83,97.35 48.83,67.42 v42.08,60.67
32KHZ  (via drill 0.3)
  Top 0.15: 90.04,58.76 88.65,60.15 U1.1 | 90.04,58.76 92.1,56.7 R2_PINH1.1 | v39.38,46.35 36.75,43.72 20.4,43.72 17.77,46.35 17.77,48.83 U2.9 | 90.04,58.76 v87.83,56.55
  Bottom 0.15: v39.38,46.35 77.62,46.35 v87.83,56.55
DN  (via drill 0.3)
  Top 0.15: 164.29,53.74 164.25,53.77 164.25,54.23 164.47,54.45 165.07,54.45 J2.A7 | 164.29,53.74 164.47,53.55 165.07,53.55 J2.B7 | v159,48.45 157.2,48.45 D1.4 | 164.29,53.74 v164.1,53.55
  Bottom 0.15: v164.1,53.55 v159,48.45
DP
  Top 0.15: 165.79,54.11 165.97,54.3 165.97,54.75 165.75,54.98 165.15,54.98 J2.B6 | 165.79,54.11 165.75,54.08 165.15,54.08 J2.A6 | 165.79,54.11 166.8,53.1 166.8,51.15 166.12,50.48 164.55,50.48 164.4,50.33 157.2,50.33 D1.6
EPD_3V3  (via drill 0.3)
  Top 0.15: 65.85,21.15 65.85,25.72 67.35,27.22 C7.2 | 65.85,21.15 65.85,20.92 Q2.2 65.85,21.15 | J1.16 81.3,13.88 81.75,13.88 J1.15 81.83,13.95 81.83,14.33 v82.2,14.7 | EPD_C5.2 89.92,22.05 v89.92,22.88 89.92,27 85.72,31.2 85.72,33.15 L1.2 | v72.6,12 67.72,7.12 TP17.TP | v67.72,21.15 65.85,21.15
  Bottom 0.15: 88.01,21.34 89.55,22.88 v89.92,22.88 | 88.01,21.34 87.97,21.3 87.97,18.53 83.62,14.17 82.95,14.17 82.42,14.7 v82.2,14.7 79.5,12 v72.6,12 | v67.72,21.15 76.58,21.15 78.53,23.1 86.25,23.1 88.01,21.34
EPD_3V3_C  (via drill 0.3)
  Top 0.15: 64.01,18.49 65.48,17.02 R_CL1.1 | 64.01,18.49 63.98,18.53 63.98,20.85 Q2.1 63.9,20.92 v63.23,21.6 | v24.07,62.25 20.25,66.08 20.25,66.38 U2.18 | v63.23,38.33 v42.3,59.25 | 64.01,18.49 60.67,15.15 57.3,15.15 TP13.TP
  Bottom 0.15: v24.07,62.25 39.3,62.25 v42.3,59.25 | v63.23,21.6 v63.23,38.33
EPD_BUSY  (via drill 0.3)
  Top 0.15: v83.85,12.53 84.75,13.42 84.75,13.88 J1.9 | v54.45,7.35 45.52,7.35 TP9.TP 45.52,7.42 v45.52,19.42 | v18.52,57.67 10.12,66.08 10.12,66.38 U2.26
  Bottom 0.15: v83.85,12.53 83.47,12.53 81.3,10.35 57.45,10.35 v54.45,7.35 | v18.52,57.67 35.77,57.67 37.95,55.5 37.95,31.42 36,29.47 36,28.95 v45.52,19.42
EPD_CS  (via drill 0.3)
  Top 0.15: v83.25,14.7 83.25,13.95 J1.12 | v73.42,19.2 72.6,18.38 R9.1 72.53,18.38 71.17,18.38 69,20.55 69,23.85 71.03,25.88 72.22,25.88 72.9,25.2 73.12,25.2 D6.1 | v20.25,46.8 20.25,48.83 U2.11 | v56.02,10.05 56.02,5.85 TP10.TP
  Bottom 0.15: v83.25,14.7 83.25,15.22 82.42,16.05 82.2,16.05 81.83,16.42 81.83,20.92 81.38,21.38 78.15,21.38 75.97,19.2 v73.42,19.2 73.12,18.9 55.35,18.9 | v20.25,46.8 20.25,44.03 45.38,18.9 55.35,18.9 | v56.02,10.05 56.02,14.55 55.35,15.22 55.35,18.9
EPD_DC  (via drill 0.3)
  Top 0.15: v82.8,12.53 83.78,13.5 83.78,13.88 J1.11 | v14.62,42.6 13.65,43.58 TP11.TP | v12.68,46.95 12.68,48.83 U2.5
  Bottom 0.15: v82.8,12.53 80.47,12.53 78.6,10.65 57.3,10.65 56.17,9.53 47.7,9.53 v14.62,42.6 12.68,44.55 v12.68,46.95
EPD_RST  (via drill 0.3)
  Top 0.15: v83.85,15.08 84.22,14.7 84.22,13.95 J1.10 | v81,16.58 v82.35,16.58 | v56.55,12 56.02,12 55.2,11.17 TP12.TP | v24.3,58.2 16.5,66 16.5,66.38 U2.21 | v39.15,50.48 39.15,50.33 50.17,39.3 50.17,21.08 v55.88,15.38
  Bottom 0.15: v82.35,16.58 v83.85,15.08 | v81,16.58 67.88,16.58 64.35,13.05 57.6,13.05 57.56,13.01 | v56.55,12 57.56,13.01 | v24.3,58.2 35.7,58.2 39.15,54.75 v39.15,50.48 | v55.88,15.38 55.88,15.15 57.52,13.5 57.52,13.05 57.56,13.01
FLASH_CS
  Top 0.15: 28.84,46.24 33.9,51.3 D9.1 33.9,51.38 32.62,52.65 32.62,56.62 33,57 33.75,57 34.65,57.9 34.65,59.55 33.98,60.23 33.52,60.23 U3.1 | 28.84,46.24 28.8,46.2 28.8,44.92 R5.1 | U2.12 21.52,48.83 21.52,48.6 23.85,46.28 28.8,46.28 28.84,46.24
GDR  (via drill 0.3)
  Top 0.15: v88.28,15.08 88.28,13.95 J1.2 | v89.25,21.9 89.25,22.8 84.9,27.15 80.33,27.15 R4.2 80.25,27.22 v80.25,28.05 | v73.35,28.28 72.9,28.72 72.9,28.88 Q3.1
  Bottom 0.15: v88.28,15.08 88.28,20.92 v89.25,21.9 | v73.35,28.28 80.03,28.28 v80.25,28.05
GND  (via drill 0.3, 0.35)
  Top 0.3: U4.9 139.43,50.85 139.43,50.62 138.97,50.17 138.53,50.17 U4.4 138.38,50.1 138.15,50.1 134.4,46.35 128.85,46.35 127.72,47.48 | U4.9 139.5,51.08 138.9,51.67 138.53,51.67 U4.1 138.38,51.75 136.35,53.77 130.88,53.77 C2_BAT.2 | U4.9 139.5,50.7 140.4,50.7 U4.6 140.55,50.7 143.7,50.7 146.7,53.7 152.55,53.7 152.62,53.77 | 127.72,47.48 125.1,44.85 R2_BAT.1 124.95,44.85 118.5,51.3 118.5,55.65 C1_BAT.2 | 127.72,47.48 127.72,54 127.2,54.52 126.83,54.52 MCP73831.2 126.67,54.67 126.3,54.67 125.1,55.88 125.1,55.95 124.2,56.85 117.15,56.85 107.17,46.88 | J2.MP3 165.75,49.12 169.57,49.12 J2.MP1 169.65,49.27 169.65,59.25 J2.MP2 169.57,59.4 165.82,59.4 J2.MP4 165.68,59.33 165.15,58.8 165.15,57.75 J2.A12 165.15,57.6 165.15,57.38 J2.B1 165,57.3 158.85,57.3 157.28,55.73 R2-USB.2 157.12,55.65 153.45,55.65 R2-USB1.1 153.3,55.5 152.62,54.83 152.62,53.77 | J2.B12 165.15,51.15 165.15,50.92 J2.A1 165,50.92 156.38,50.92 155.93,50.48 | C5_USB.2 155.1,44.7 155.1,46.05 C4_USB.2 155.18,46.2 155.55,46.58 155.55,48.83 155.03,49.35 154.65,49.35 D1.2 155.1,49.42 155.55,49.88 155.55,50.1 155.93,50.48 | 155.93,50.48 152.62,53.77 | U1.13 84.83,50.77 84.83,50.33 89.78,45.38 89.78,44.55 C8.1 89.92,44.47 90.67,43.72 | 97.72,47.4 94.05,43.72 90.67,43.72 | 97.72,47.4 98.03,47.7 98.03,48.75 96.75,50.02 96.75,50.4 C10_SUPERCAP.1 | IC4.2 121.22,38.6 122.25,38.6 122.25,38.3 | C1_BAT2.2 130.57,39.6 128.1,39.6 127.65,39.15 C3.- 127.5,39.08 127.12,38.7 126.08,38.7 126.08,38.3 | C1.2 156.3,11.55 154.5,11.55 C2.2 154.5,11.7 154.5,13.5 SENSOR2.5 | SENSOR2.7 153.07,13.58 153.07,14.03 153.45,14.4 154.12,14.4 154.57,13.95 154.57,13.58 SENSOR2.5
  Top 0.3: 152.7,17.33 152.25,16.88 152.25,16.5 SENSOR2.1 | 152.7,17.33 154.95,17.33 155.18,17.1 | 155.18,17.1 155.18,14.55 154.65,14.03 SENSOR2.5 | 155.18,17.1 155.4,17.33 165.22,17.33 J3.1 | 152.7,17.33 147,23.03 147,24.15 TP4.TP 146.93,24.3 145.2,26.03 138.82,26.03 TP5.TP 138.68,26.17 134.85,26.17 126.08,34.95 126.08,38.3 | 107.17,46.88 115.65,38.4 R1_PWRUSB.1 115.8,38.25 118.8,35.25 118.8,34.72 C1_BAT1.2 118.95,34.58 119.62,33.9 120.6,33.9 121.88,35.18 121.88,37.93 122.25,38.3 | 107.17,46.88 106.72,47.33 97.8,47.33 97.72,47.4 | 37.12,32.1 38.02,32.1 D8.2 | 37.12,32.1 36,32.1 D11.2 | 40.95,26.85 40.95,31.35 D12.2 40.2,32.25 40.2,33.3 41.85,34.95 41.85,47.02 36.15,52.73 34.05,52.73 D9.2 33.9,52.88 33,53.77 33,55.42 33.23,55.65 | 40.95,26.85 40.58,26.47 37.5,26.47 37.12,26.85 37.12,32.1 | 33.23,55.65 33.45,55.88 33.45,56.4 U3.4 33.6,56.55 35.55,56.55 37.35,58.35 U3.9 | 95.47,26.78 95.08,27.17 95.08,31.15 93.97,32.25 D3.1 93.83,32.33 90,36.15 | 95.47,26.78 96.75,25.5 EPD_C11.1 | 90,36.15 80.47,36.15 77.62,33.3 77.62,33 78.5,32.12 78.5,27.67 R4.1 | 75.83,21.75 73.2,21.75 EPD_C1.1 | 75.83,21.36 | 75.83,21.36 EPD_C10.1 | EPD_C2.1 69.75,22.35 72.6,22.35 EPD_C1.1 | 72.45,24.38 71.7,25.12 D6.2 | 72.45,24.38 72.75,24.08 73.42,24.08 73.95,24.6 73.95,29.03 73.42,29.55 69.45,29.55 68.55,28.65 67.42,28.65 C7.1 | EPD_C1.1 72.38,22.42 72.38,24.3 72.45,24.38 | 70.28,15.08 69.45,15.9 68.7,15.9 R2.1 | 70.28,15.08 73.95,11.4 J1.MP2 76.42,11.4 77.78,11.4 77.85,11.33 89.7,11.33 J1.MP1 89.78,14.33 | 70.28,15.08 69.15,13.95 68.1,13.95 67.12,14.92 66.67,14.92 SJ1.1 66.67,14.78 66.67,14.7 65.78,13.8 56.7,13.8 43.73,26.78 41.02,26.78 40.95,26.85
  Top 0.3: 85.28,14.4 84,15.67 82.05,15.67 80.78,14.4 80.78,13.95 J1.17 | 85.28,14.4 85.28,13.95 J1.8 | 89.78,14.33 88.42,15.67 86.55,15.67 85.28,14.4 | 88.35,21.3 89.4,21.3 89.47,21.22 90.53,21.22 EPD_C5.1 91.42,22.05 92.85,23.47 97.5,23.47 | 88.35,21.3 EPD_C7.1 | 97.5,23.47 97.65,23.33 97.65,22.28 96.9,21.53 EPD_C6.1 96.83,21.38 89.78,14.33 | 88.35,21.3 88.35,23.1 88.2,23.25 87,23.25 85.12,21.38 84.97,21.38 EPD_C8.1 EPD_C9.1 82.12,21.3 82.12,21 81.38,20.25 81.08,20.25 80.1,21.22 79.58,21.22 EPD_C12.1 79.42,21.3 79.2,21.3 77.4,23.1 75.97,23.1 75.83,22.95 75.83,21.75 | 75.83,21.75 75.83,21.36 | 95.47,26.78 96.15,27.45 97.35,27.45 97.88,26.92 97.88,23.85 97.5,23.47 | C10.2 53.4,107.4 51,107.4 50.77,107.62 CHANGE_BUTTON.2 50.62,107.62 48.75,107.62 48,106.88 | 48,106.88 48,98.78 47.55,98.33 IC1.3 v47.25,97.58 | 48,106.88 47.25,107.62 CHANGE_BUTTON.1 | C6.2 67.65,107.1 66.22,107.1 65.7,107.62 BOOT_BUTTON.2 65.55,107.7 62.33,107.7 BOOT_BUTTON.1 62.17,107.62 62.17,106.35 51.3,95.47 49.12,95.47 48.38,96.22 C_DELAY.2 48.23,96.38 48.15,96.45 v48.15,97.12 | C9.2 23.77,98.85 24.52,98.1 24.52,94.35 23.48,93.3 D10.2 23.32,93.22 20.1,90 16.5,90 16.43,89.92 | 16.43,89.92 16.43,87 15.53,86.1 15.53,85.2 J4.G1 | 16.43,89.92 15.53,90.83 J4.G2 15.38,90.9 6.6,99.67 | U2.29_1 12.07,54.9 13.2,54.9 U2.29_4 13.35,54.9 14.47,54.9 U2.29_7 14.47,55.05 14.47,56.1 U2.29_8 14.55,56.25 14.55,57.38 U2.29_9 | U2.29_2 12.07,56.1 12.07,55.05 U2.29_1 | U2.29_5 13.2,56.1 12.22,56.1 U2.29_2 | U2.29_3 12,56.25 U2.29_2 | U2.29_6 13.2,57.38 12.15,57.38 U2.29_3 | U2.1 7.58,48.9 7.58,50.33 12,54.75 U2.29_1
  Top 0.3: 6.6,99.67 2.33,95.4 J4.G4 2.25,95.25 2.25,94.8 4.58,92.47 4.88,92.47 J4.P6 4.5,92.4 1.27,89.17 1.27,82.28 J4.G3 1.27,82.12 7.5,75.9 7.5,66.45 U2.28 7.65,66.3 7.65,65.92 v12,61.58 | 6.6,99.67 16.05,109.12 19.57,109.12 20.93,107.78 22.27,107.78 RESET_BUTTON.1 22.43,107.7 25.8,107.7 RESET_BUTTON.2 25.95,107.62 26.1,107.47 30.6,107.47 C5.2 30.68,107.33 v31.43,106.58 | v12,58.27 12,57.52 U2.29_3 | v33.15,55.8 33.15,55.73 33.23,55.65 | v90.6,41.1 90.1,41.6 90.1,43.15 90.67,43.72 | 90,36.15 v90.6,36.75 | 126.08,38.3 124.54,38.3 124.5,38.34 123.36,38.34 123.32,38.3 122.25,38.3
  Bottom 0.3: v48.15,97.12 47.7,97.58 v47.25,97.58 47.17,97.65 40.35,97.65 v31.43,106.58 | v12,61.58 v12,58.27 14.47,55.8 v33.15,55.8 | v90.6,36.75 v90.6,41.1
  other vias: 29.3,101.6 68.4,55.3 90.6,66.2 91.7,53.2 87.2,69.5 29.4,60.2 31.5,56.5 30.4,37.7 19,61 33.2,41.4 34.1,44.8 24.4,45.5 24.9,44.3 127.3,43
  pour Top: 73.86,10.26 73.88,10.28 93.12,10.28 93.14,10.26 93.16,10.24 93.18,10.22 93.18,0.18 170.82,0.18 170.82,66.72 92.88,66.72 92.86,66.74 92.84,66.76 92.82,66.78 92.82,110.82 68.18,110.82 68.18,109.88 68.16,109.86 68.14,109.84 68.12,109.82 19.88,109.82 19.86,109.84 19.84,109.86 19.82,109.88 19.82,110.82 0.27,110.82 0.28,110.82 0.28,68.28 6.42,68.28 6.44,68.26 6.56,68.14 6.58,68.12 6.58,47.58 6.56,47.56 6.34,47.34 6.32,47.32 0.28,47.32 0.28,0.27 0.28,0.28 73.72,0.28 73.72,10.12 73.74,10.14
  pour Bottom: 73.86,10.26 73.88,10.28 93.12,10.28 93.14,10.26 93.16,10.24 93.18,10.22 93.18,0.18 170.82,0.18 170.82,66.72 92.88,66.72 92.86,66.74 92.84,66.76 92.82,66.78 92.82,110.82 68.18,110.82 68.18,109.88 68.16,109.86 68.14,109.84 68.12,109.82 19.88,109.82 19.86,109.84 19.84,109.86 19.82,109.88 19.82,110.82 0.27,110.82 0.28,110.82 0.28,68.28 6.42,68.28 6.44,68.26 6.56,68.14 6.58,68.12 6.58,47.58 6.56,47.56 6.34,47.34 6.32,47.32 0.28,47.32 0.28,0.27 0.28,0.28 73.77,0.28 73.82,0.33 73.82,10.22 73.84,10.24
GPIO8
  Top 0.15: R1.1 20.48,44.78 20.48,44.92 18.98,46.42 18.98,48.83 U2.10
I2C_PW
  Top 0.15: C1.1 156.3,10.2 154.5,10.2 C2.1 154.43,10.28 154.12,10.28 152.93,11.47 152.62,11.47 R1_PINH.2 | 152.25,11.55 152.55,11.55 R1_PINH.2 | 152.25,11.55 150.75,11.55 R2_PINH.2 150.68,11.55 119.47,11.55 89.25,41.78 89.25,44.55 84.83,48.98 79.95,48.98 66.67,62.25 25.35,62.25 21.52,66.08 21.52,66.38 U2.17 | 152.25,11.55 152.25,12.83 | 152.25,12.83 152.25,13.5 SENSOR2.8 152.25,13.58 152.25,13.88 153,14.62 153,16.42 SENSOR2.2 | 152.25,11.55 R1_PINH.2 | 152.25,12.83 153.38,12.83 153.75,13.2 153.75,13.5 SENSOR2.6
INT_RTC  (via drill 0.3)
  Top 0.15: R1_PINH1.1 91.8,60.08 92.1,60.08 95.03,57.15 95.03,56.17 95.25,55.95 96.75,55.95 98.55,57.75 98.55,60.3 TP15.TP 98.55,60.38 98.55,60.98 90,69.53 90,72.9 89.25,73.65 88.2,73.65 85.8,71.25 85.8,60.45 86.03,60.23 U1.3 86.03,60.15 86.03,59.77 v84.97,58.73 | v41.25,46.88 37.8,43.42 20.25,43.42 16.5,47.17 16.5,48.83 U2.8
  Bottom 0.15: v41.25,46.88 73.12,46.88 v84.97,58.73
IO/BOOT
  Top 0.15: C6.1 67.65,108.38 66.6,108.38 65.85,109.12 65.7,109.12 BOOT_BUTTON.3 65.62,109.2 62.25,109.2 BOOT_BUTTON.4 62.17,109.12 62.02,109.12 61.2,108.3 61.2,106.65 59.25,104.7 R_BOOT.1 59.25,104.62 53.33,104.62 49.05,100.35 49.05,98.7 24.07,73.72 24.07,66.45 U2.15
IO/CHANGE
  Top 0.15: C10.1 53.4,108.75 51.15,108.75 50.77,109.12 CHANGE_BUTTON.3 47.25,109.2 CHANGE_BUTTON.4 47.17,109.12 47.02,109.12 40.73,102.83 R_CHANGE.1 40.8,100.5 41.25,100.5 42.3,99.45 42.3,97.58 13.95,69.22 13.95,66.45 U2.23
MISO
  Top 0.15: R8.1 40.12,27.38 40.12,27.53 39.08,28.58 39.08,29.55 40.12,30.6 D12.1 39.45,31.35 39.45,33.15 40.35,34.05 40.35,43.05 | 40.35,43.05 40.35,43.28 TP6.TP 40.35,43.05 | 13.99,60.94 8.85,66.08 8.85,66.38 U2.27 8.88,66.45 8.88,90.05 5.4,93.53 5.1,93.53 J4.P7 | 13.99,60.94 17.77,57.15 23.93,57.15 25.73,58.95 33.45,58.95 U3.2 | 40.35,43.05 15.9,43.05 11.1,47.85 7.05,47.85 6.83,48.08 6.83,53.77 13.99,60.94
MOSI  (via drill 0.3)
  Top 0.15: v78.38,12.53 81.9,12.53 82.28,12.9 82.28,13.88 J1.14 | v57.75,12.53 53.1,12.53 39.52,26.1 37.2,26.1 36.08,27.22 R7.1 36,27.3 35.33,27.97 35.33,28.95 36,29.62 D11.1 36,30.67 v35.1,31.58 | 41.33,52.2 41.33,48.6 51.38,38.55 51.38,37.2 TP7.TP | 41.33,52.2 41.33,56.4 U3.5 | v4.35,87.75 4.35,88.42 5.03,89.1 J4.P3 | v15.15,50.02 U2.7 | v37.42,52.2 41.33,52.2
  Bottom 0.15: v57.75,12.53 v78.38,12.53 | v4.35,87.75 4.35,70.42 10.88,63.9 10.88,54.3 v15.15,50.02 15.15,50.1 17.25,52.2 35.1,52.2 | 35.1,52.2 v37.42,52.2 | 35.1,52.2 v35.1,31.58
N$1
  Top 0.15: R2-USB.1 157.2,54.38 162.9,54.38 164.47,55.95 165.07,55.95 J2.B5
N$2
  Top 0.15: R2-USB1.2 153.45,54.3 156.07,54.3 157.35,53.02 165.07,53.02 J2.A5
N$5
  Top 0.15: IC4.3 121.02,37.62 120.75,37.62 | 120.25,37.62 120.09,37.84 119.73,38.19 119.08,38.12 D2.1 | 120.25,37.62 120.75,37.62 | 120.25,37.62 120.25,35 C1_BAT1.1 | Q1.2 133.57,45 132.82,45 128.62,40.8 123.38,40.8 122.25,39.67 121.2,39.67 IC4.1 121.12,39.6 120.9,39.6 120.45,39.16 120.45,38.3 120.75,38 120.75,37.62
N$8
  Top 0.15: R1_BAT.2 122.25,53.48 122.78,53.48 123.45,54.15 126,54.15 126.45,53.7 126.75,53.7 MCP73831.1
N$9
  Top 0.15: R2_BAT.2 125.03,46.12 125.03,52.8 124.2,53.62 MCP73831.5
N$10
  Top 0.15: CHG_LED.C 120.45,55.5 120.45,53.92 120.9,53.48 R1_BAT.1
N$11  (via drill 0.3)
  Top 0.15: v85.65,37.05 84.22,37.05 C4.1 | v89.62,33.08 90.38,32.33 D3.2 90.45,32.25 93.3,29.4 93.3,28.42 D4.1
  Bottom 0.15: v89.62,33.08 v85.65,37.05
N$12
  Top 0.15: J1.18 80.33,13.95 80.33,14.55 81.83,16.05 90.08,16.05 96.83,22.8 EPD_C6.2
N$13
  Top 0.15: J1.19 79.8,13.95 79.8,16.05 84.45,20.7 85.72,20.7 87.6,22.58 EPD_C7.2
N$14  (via drill 0.3)
  Top 0.15: v83.25,20.7 79.35,16.8 79.35,13.95 J1.20 | v84.08,21.9 84.83,22.65 EPD_C8.2
  Bottom 0.15: v83.25,20.7 83.25,21.08 v84.08,21.9
N$15
  Top 0.15: C_DELAY.1 49.58,96.3 49.58,97.72 49.35,97.95 49.35,99.53 50.02,100.2 IC1.5
N$16
  Top 0.15: J1.22 78.22,13.95 78.22,21.6 77.4,22.42 76.65,22.42 EPD_C10.2
N$17
  Top 0.15: D7.1 86.55,64.35 88.2,62.7 R_CAPACITOR.2
N$18  (via drill 0.3)
  Top 0.15: v77.62,21.53 77.33,21.22 77.33,13.95 J1.24 | v78.67,22.58 79.5,22.58 EPD_C12.2
  Bottom 0.15: v78.67,22.58 v77.62,21.53
N$21
  Top 0.15: J1.4 87.22,13.88 87.22,13.42 85.8,12 78.22,12 74.47,15.75 74.47,19.2 72.75,20.92 EPD_C1.2
N$22  (via drill 0.3)
  Top 0.15: v87.15,14.7 86.85,14.4 86.85,13.95 J1.5 | v70.42,21.67 69.75,21 EPD_C2.2
  Bottom 0.15: v87.15,14.7 87.97,14.7 88.12,14.55 88.42,14.55 90.45,16.58 90.45,23.03 90.08,23.4 72.15,23.4 v70.42,21.67
PREVGH  (via drill 0.3)
  Top 0.15: v82.42,20.55 78.83,16.95 78.83,13.95 J1.21 | v82.88,21.97 82.2,22.65 EPD_C9.2 82.2,22.72 79.65,25.28 79.65,27.67 79.72,27.75 79.72,32.17 D5.1
  Bottom 0.15: v82.42,20.55 82.42,21.53 v82.88,21.97
PREVGL  (via drill 0.3)
  Top 0.15: v81.75,13.05 78.22,13.05 77.85,13.42 77.85,13.88 J1.23 | D4.2 89.92,28.35 v90.75,27.53 93.45,24.83 97.35,24.83 97.5,24.97 97.5,25.88 96.83,26.55 96.83,26.7 EPD_C11.2
  Bottom 0.15: v81.75,13.05 87.38,13.05 90.75,16.42 v90.75,27.53
RESE
  Top 0.15: 71.59,26.89 72.3,27.6 72.83,27.6 Q3.2 | 71.59,26.89 68.7,24 68.7,20.4 71.47,17.62 72.15,17.62 78.08,11.7 86.03,11.7 87.75,13.42 87.75,13.88 J1.3 | 71.59,26.89 69.83,28.65 R3.2
RESE'
  Top 0.15: 67.31,16.01 67.28,16.05 65.92,16.05 65.1,15.22 SJ1.2 | 67.31,16.01 68.62,14.7 R2.2 | 67.31,16.01 68.25,16.95 68.25,24.3 69.75,25.8 69.75,27.38 R3.1
RESET  (via drill 0.3)
  Top 0.15: RESET_BUTTON.4 22.43,109.2 25.88,109.2 RESET_BUTTON.3 25.95,109.12 30.23,109.12 31.88,107.47 C5.1 31.95,107.4 31.95,106.42 31.91,106.39 | 31.91,106.39 31.57,106.05 22.43,106.05 21.38,107.1 19.05,107.1 R_RESET.1 19.05,107.03 v18.38,106.35 | v42.15,100.28 47.25,100.28 IC1.1 | v38.48,100.28 38.02,100.28 31.91,106.39 | v13.35,53.02 10.12,49.8 10.12,48.9 U2.3
  Bottom 0.15: v38.48,100.28 v42.15,100.28 | v13.35,53.02 13.35,56.25 11.47,58.12 11.47,99.45 v18.38,106.35
RTC_RST
  Top 0.15: U2.16 22.8,66.38 22.8,66.08 26.32,62.55 82.72,62.55 84.75,60.52 84.75,60.23 U1.4
RX
  Top 0.15: U2.24 12.68,66.45 12.68,69.75 14.18,71.25 TP2.TP
SCK  (via drill 0.3)
  Top 0.15: 9.19,98.51 12.82,94.88 20.32,94.88 21.9,93.3 D10.1 | 9.19,98.51 9.15,98.55 9.15,99.83 9.82,100.5 9.82,100.65 R6.1 | J4.P5 5.4,91.35 v6.15,92.1 | v8.85,98.47 9.15,98.47 9.19,98.51 | v82.72,15.08 82.72,13.95 J1.13 | v81.22,20.85 81.22,23.25 75.53,28.95 75.53,29.4 67.12,37.8 59.92,37.8 58.05,39.67 TP8.TP 58.05,40.72 41.36,57.41 | 41.36,57.41 41.33,57.45 41.33,57.67 U3.6 | v18,53.55 13.95,49.5 13.95,48.9 U2.6 | v36.98,55.8 39.23,55.8 40.8,57.38 41.33,57.38 41.36,57.41
  Bottom 0.15: v8.85,98.47 6.15,95.78 v6.15,92.1 6.15,69.08 11.18,64.05 11.18,54.52 13.2,52.5 16.95,52.5 v18,53.55 34.73,53.55 v36.98,55.8 | v82.72,15.08 81.53,16.28 81.53,20.55 v81.22,20.85
SCL  (via drill 0.3)
  Top 0.15: 154.57,9.3 159.38,9.3 166.65,16.58 166.65,19.28 165.6,20.33 165.3,20.33 J3.4 | 154.57,9.3 152.32,9.3 151.43,10.2 150.75,10.2 R2_PINH.1 | v154.57,14.7 154.57,16.42 SENSOR2.4 | 154.57,9.3 v154.57,9.08 | 141.64,51.41 141.75,51.52 141.75,53.62 136.72,58.65 99.9,58.65 92.1,50.85 88.65,50.85 U1.16 88.58,50.77 87.97,50.17 v87.97,49.65 | 141.64,51.41 141.38,51.15 140.47,51.15 U4.7 | v84.67,48.45 69,48.45 56.25,61.2 22.57,61.2 17.77,66 17.77,66.38 U2.20 | 141.64,51.41 v141.75,51.3
  Bottom 0.15: v154.57,9.08 v154.57,14.7 154.57,38.47 v141.75,51.3 | v84.67,48.45 86.78,48.45 v87.97,49.65
SDA  (via drill 0.3)
  Top 0.15: 153.41,10.16 153.97,9.6 158.78,9.6 166.2,17.03 166.2,18.75 165.6,19.35 165.3,19.35 J3.3 | 153.41,10.16 153.38,10.2 152.62,10.2 R1_PINH.1 | v141.22,51.67 140.47,51.67 U4.8 | v153.53,15.53 153.53,16.2 153.75,16.42 SENSOR2.3 | v153.45,10.28 153.45,10.2 153.41,10.16 | v55.5,61.73 23.32,61.73 18.98,66.08 18.98,66.38 U2.19 | v87.3,57.08 87.3,50.85 U1.15
  Bottom 0.15: v153.45,10.28 153.45,15.53 v153.53,15.53 141.22,27.83 v141.22,51.67 111.6,51.67 106.2,57.08 v87.3,57.08 82.65,61.73 v55.5,61.73
SRC  (via drill 0.3)
  Top 0.15: C4.2 82.8,37.05 80.78,37.05 76.35,32.62 76.35,32.25 D5.2 76.28,32.17 v75,30.9 | v75,29.25 75,28.35 Q3.3 | v78.22,33.15 L1.1
  Bottom 0.15: v75,29.25 v75,30.9 77.25,33.15 v78.22,33.15
SS_SD  (via drill 0.3)
  Top 0.15: R10.1 38.1,27.22 38.1,27.38 38.77,28.05 38.77,29.92 38.1,30.6 D8.1 38.1,30.67 38.1,30.83 38.77,31.5 38.77,32.7 v28.95,42.53 | v6.83,86.78 5.55,88.05 J4.P2 | v6.83,54.52 v6.83,69.08 | v11.32,50.02 11.32,48.9 U2.4
  Bottom 0.15: v6.83,69.08 v6.83,86.78 | v6.83,54.52 v11.32,50.02 11.85,49.5 18.23,49.5 25.2,42.53 v28.95,42.53
TX
  Top 0.15: TP1.TP 11.32,70.88 11.32,66.45 U2.25
USB_D+  (via drill 0.3)
  Top 0.15: v144.07,50.33 154.57,50.33 D1.1 | v40.12,55.73 39.6,55.73 39.15,55.27 v33.6,55.27 | v29.77,54.6 24.07,48.9 U2.14
  Bottom 0.15: v144.07,50.33 143.85,50.33 131.62,62.55 46.95,62.55 v40.12,55.73 | v33.6,55.27 30.45,55.27 v29.77,54.6
USB_D-  (via drill 0.3)
  Top 0.15: v145.28,48.45 154.57,48.45 D1.3 | v40.12,54.3 34.2,54.3 v33.98,54.08 | v27.68,54.08 22.8,49.2 22.8,48.9 U2.13
  Bottom 0.15: v145.28,48.45 131.47,62.25 48.08,62.25 v40.12,54.3 | v27.68,54.08 v33.98,54.08
VBAT
  Top 0.15: U4.2 138.53,51.15 138.53,50.7 U4.3 138.45,50.62 138.07,50.62 134.62,47.17 132.68,47.17 Q1.3 132.6,47.17 132.6,50.85 130.12,53.33 130.12,55.12 | 130.12,55.12 127.2,55.12 126.83,55.5 MCP73831.3 | 130.12,55.12 130.8,55.12 C2_BAT.1 130.88,55.12 133.12,57.38 136.2,57.38 TP3.TP
VBUS
  Top 0.3: D1.5 157.12,49.35 156.68,49.35 156.22,48.9 156.22,46.35 156.38,46.2 C4_USB.1 156.45,46.05 156.45,44.7 C5_USB.1 156.38,44.55 156.38,42.6 154.5,40.72 PFMF.050.1.2 150.07,36.22 150.07,35.33 TP14.TP 150,36.3 143.7,36.3 134.18,45.83 132.6,45.83 131.85,45.08 Q1.1 131.7,45 126.53,45 125.03,43.5 | MCP73831.4 124.12,55.58 121.95,55.58 CHG_LED.A 121.8,55.65 121.05,56.4 117.97,56.4 117.22,55.65 C1_BAT.1 117.3,55.58 117.3,51.23 125.03,43.5 | R1_PWRUSB.2 115.8,39.6 118.42,39.6 118.65,39.83 D2.2 118.8,39.9 119.17,40.28 121.8,40.28 125.03,43.5
VRTC
  Top 0.15: C10_SUPERCAP.2 93,44.55 91.2,44.55 C8.2 91.2,44.62 91.2,45.38 86.1,50.48 86.1,50.77 U1.14 86.1,50.85 86.62,51.38 86.62,61.05 86.85,61.27 86.85,62.62 R_CAPACITOR.1
VUSB  (via drill 0.3)
  Top 0.3: J2.A4 165.15,51.75 165.15,51.98 J2.B9 165.3,51.98 165.75,51.98 v166.12,52.35 | J2.A9 165.15,56.77 165.15,56.55 J2.B4 165.3,56.55 165.75,56.55 v166.12,56.17 | v159,45.22 159,40.65 PFMF.050.1.1
  Bottom 0.3: v166.12,56.17 v166.12,52.35 v159,45.22